# Altium PCB SL-DPT100.PcbDoc (part 3 of 3)
Units mm, origin at the board's own origin, x right, y up, seen from the top; angles counter-clockwise.
Board outline 82 x 97 mm, 4 copper layers (Top Layer, VCC, GND, Bottom Layer); 177 components, 169 nets, 599 pads, 430 vias.
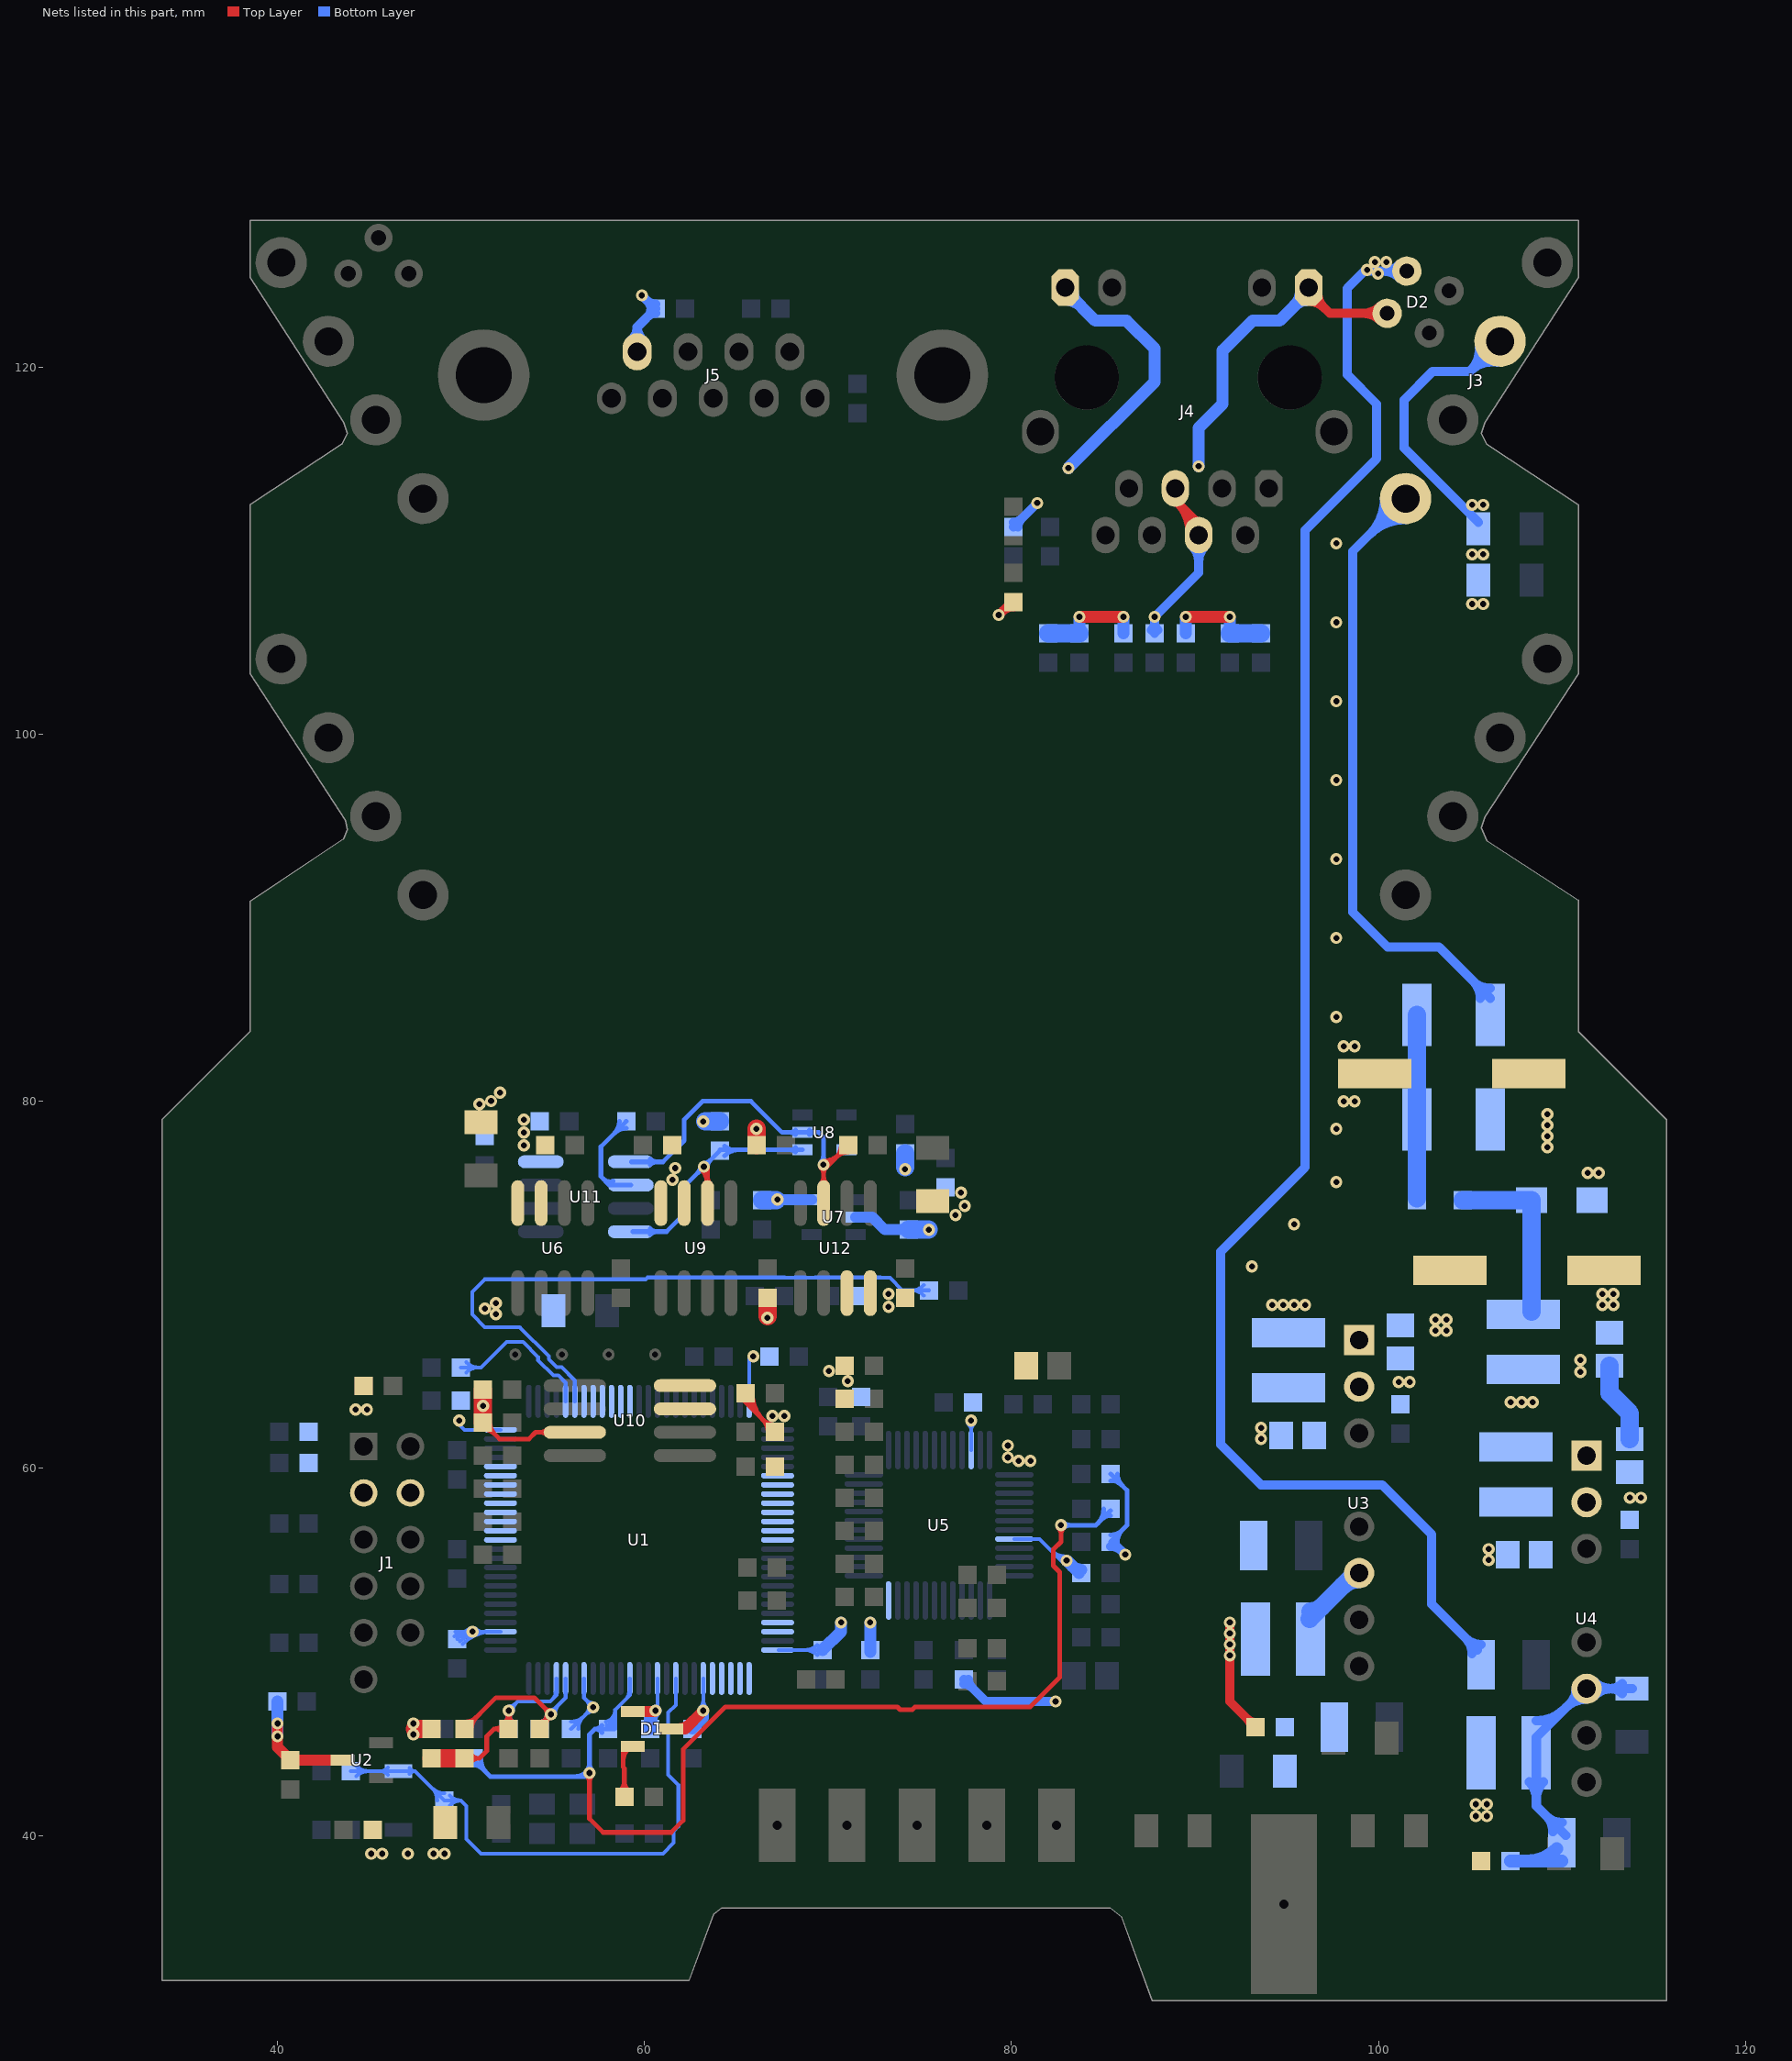
[diagram p5: the nets of this part, all layers, seen from the top]

## Via types
v1: diameter 0.66, hole 0.33, Top Layer to Bottom Layer, tented both sides, 430 vias

## Nets (pads, with @x,y where several pads share a name; then routed paths per layer and width w, separated by ;. In a path a pad name is that pad's centre, name@x,y a point inside that pad or via, vN(x,y) a via of type N, cw(c..) or ccw(c..) an arc to the next point about the centre after c; other vN are vias at no path point) (continued)
PC15: C52.2 R45.1 U1.9 X1.1 | length 36.4
  Bottom Layer w0.203: C52.2@44,43.5 47.5,43.5 ; C52.2@44.282,43.218 cw(c44.962,42.538) 44.962,43.5 cw(c44.962,44.462) C52.2@44.282,43.782 ; X1.1@46.021,43.307 ccw(c45.554,42.84) 45.554,43.5 ccw(c45.554,44.16) X1.1@46.021,43.693 ; X1.1@47.186,43.34 cw(c47.5,43.112) 47.5,43.5 ; X1.1@47.186,43.66 ccw(c47.5,43.888) 47.5,43.5 ; R45.1@48.702,41.9 ccw(c47.74,41.9) 48.42,42.58 ccw(c49.1,43.26) R45.1@49.1,42.298 ; R45.1@49.395,41.632 cw(c50,41.083) 50,41.9 ; R45.1@49.395,42.168 ccw(c50,42.717) 50,41.9 ; U1.9@61.7,48.55 61.7,47.1 61.295,46.695 61.295,43.3 61.847,42.748 61.847,40.489 61.591,40.233 61.591,39.591 61.005,39.005 51.095,39.005 50.3,39.8 50.3,41.6 50,41.9 ; 47.5,43.5 R45.1@49.1,41.9 50,41.9
PD0: U1.81
PD1: U1.82
PD2: U1.83
PD3: U1.84
PD4: U1.85
PD5: U1.86
PD6: U1.87
PD7: U1.88
PD8: R50.1 U1.55 | length 9.8
  Bottom Layer w0.203: R50.1@50,65.5 51.1,65.5 52.482,66.882 53.377,66.882 54.2,66.059 54.2,65.895 55.03,65.065 55.035,65.065 55.044,65.056 55.302,65.056 55.7,64.658 U1.55@55.7,63.65 ; R50.1@50.282,65.218 cw(c50.962,64.538) 50.962,65.5 cw(c50.962,66.462) R50.1@50.282,65.782
PD9: R51.1 U1.56 | length 36.6
  Bottom Layer w0.203: U1.56@56.2,63.65 56.2,64.799 55.49,65.509 55.232,65.509 55.223,65.518 55.218,65.518 54.818,65.918 54.818,65.923 54.779,65.962 54.779,66.121 53.2,67.7 51.3,67.7 50.618,68.382 50.618,69.618 51.3,70.3 60.064,70.3 60.164,70.4 67.636,70.4 67.643,70.393 68.207,70.393 68.214,70.4 68.736,70.4 68.743,70.393 69.307,70.393 69.314,70.4 72.861,70.4 72.868,70.393 73.371,70.393 74.064,69.7 R51.1@75.5,69.7 ; R51.1@75.218,69.418 ccw(c74.538,68.738) 74.538,69.7 ccw(c74.538,70.662) R51.1@75.218,69.982
PD10: U1.57
PD11: U1.58
PD12: U1.59
PD13: U1.60
PD14: U1.61
PD15: U1.62
PE0: U1.97
PE1: U1.98
PE2: U1.1
PE3: U1.2
PE4: U1.3
PE5: U1.4
PE6: U1.5
PE7: U1.38
PE8: U1.39
PE9: U1.40
PE10: U1.41
PE11: U1.42
PE12: U1.43
PE13: U1.44
PE14: U1.45
PE15: U1.46
RE#: R62.1 U11.2 | length 7.4
  Bottom Layer w0.254: 57.753,75.772 ccw(c58.118,76.137) U11.2@58.28,75.647 ; R62.1@58.627,78.9 cw(c57.727,78.9) 58.363,78.263 cw(c59,77.627) R62.1@59,78.527 ; R62.1@59,78.9 57.623,77.523 57.623,75.902 58.09,75.435 U11.2@59.25,75.435
RST#: C48.1 R36.2 R46.1 R47.2 U1.14 | length 75.7
  Top Layer w0.254: v1@56.856,43.256 cw(c56.509,42.909) 57,42.909 cw(c57.491,42.909) v1@57.144,43.256 ; v1(57,43.4) 57,40.91 57.747,40.163 61.453,40.163 62.1,40.81 62.1,44.69 64.403,46.993 73.782,46.993 73.932,46.843 74.593,46.843 74.743,46.993 81.018,46.993 82.629,48.603 82.629,54.346 82.279,54.696 82.279,55.579 82.7,56 v1@82.7,56.8 ; v1@82.556,56.756 cw(c82.209,56.409) 82.7,56.409 cw(c83.191,56.409) v1@82.844,56.756
  Bottom Layer w0.203: C48.1@57.895,46.184 ccw(c57.714,46.846) 58.4,46.846 ; C48.1@57.949,45.988 ccw(c57.787,46.58) 58.4,46.58 ; C48.1@58.002,45.792 ccw(c57.86,46.314) 58.4,46.314 ; C48.1@58.4,45.8 58.4,46.846 ; 59.009,47.455 ccw(c58.663,47.8) U1.14@59.152,47.8 ; U1.14@59.2,48.55 59.2,47.646 58.4,46.846
  Bottom Layer w0.254: R46.1@49.1,44.2 49.2,44.1 50.7,44.1 51.6,43.2 56.95,43.2 57,43.25 v1(57,43.4) 57,45.5 57.3,45.8 ; R46.1@49.184,44.284 ccw(c49.629,44.729) 49.629,44.1 ; R46.1@49.364,43.936 cw(c49.759,43.541) 49.759,44.1 ; R46.1@49.364,44.464 ccw(c50.242,45.342) R47.2@50.242,44.1 ; R46.1@49.558,44.1 ccw(c49.558,45.342) R47.2@50.436,44.464 ; 50.041,44.1 cw(c50.041,43.541) R47.2@50.436,43.936 ; 50.171,44.1 ccw(c50.171,44.729) R47.2@50.616,44.284 ; R47.2@50.7,43.827 cw(c50.7,43.168) 51.166,43.634 ; R47.2@51.073,44.2 ccw(c52.215,44.2) 51.408,43.392 ; 56.127,43.2 ccw(c56.127,44.373) v1@56.956,43.544 ; 56.64,43.2 ccw(c56.64,43.76) v1@57.036,43.364 ; v1@56.856,43.544 ccw(c56.509,43.891) 57,43.891 ccw(c57.491,43.891) v1@57.144,43.544 ; C48.1@57.69,45.592 ccw(c57.3,45.33) 57.3,45.8 ; C48.1@57.69,46.008 cw(c57.3,46.27) 57.3,45.8 ; C48.1@58.37,45.8 57.3,45.8 ; v1@82.8,56.9 84.6,56.9 R36.2@85.4,57.7 ; v1@82.844,56.756 cw(c83.191,56.409) 83.191,56.9 cw(c83.191,57.391) v1@82.844,57.044 ; 84.693,56.993 ccw(c83.885,57.8) R36.2@85.027,57.8 ; 84.934,57.234 cw(c85.4,56.768) R36.2@85.4,57.427
  other v1: 82.697,56.903
RXD: R66.1 U8.2 U11.1 U12.3 | length 26.1
  Top Layer w0.254: v1@69.606,76.396 cw(c69.223,76.013) 69.765,76.013 ; U12.3@69.607,75.508 ccw(c69.227,75.888) 69.765,75.888 ccw(c70.303,75.888) U12.3@69.923,75.508 ; v1@69.75,76.489 ccw(c69.75,77.067) 70.158,76.658 ; v1@69.75,76.743 ccw(c69.75,77.934) 70.592,77.092 ; U12.3@69.765,74.25 69.765,76.265 R66.1@71.1,77.6 ; 69.765,76.086 cw(c70.204,76.086) v1@69.894,76.396 ; R66.1@70.727,77.6 cw(c69.827,77.6) 70.463,76.963 cw(c71.1,76.326) R66.1@71.1,77.227
  Bottom Layer w0.254: U11.1@59.3,76.7 61,76.7 62.157,77.857 62.157,78.997 63.16,80 65.8,80 67.5,78.3 69.5,78.3 69.75,78.05 v1@69.75,76.525 ; U11.1@60.308,76.547 cw(c60.676,76.179) 60.676,76.7 ; U11.1@60.308,76.863 ccw(c60.7,77.255) 60.7,76.7 ; U8.2@68.228,78.178 ccw(c67.932,77.882) 67.932,78.3 ccw(c67.932,78.718) U8.2@68.228,78.422 ; U8.2@68.972,78.178 cw(c69.268,77.882) 69.268,78.3 cw(c69.268,78.718) U8.2@68.972,78.422 ; v1@69.606,76.684 ccw(c69.259,77.031) 69.75,77.031 ccw(c70.241,77.031) v1@69.894,76.684
  other v1: 69.75,76.54
TXD: R61.1 U8.1 U9.6 U11.4 | length 20.5
  Top Layer w0.254: v1@63.091,76.291 cw(c62.262,75.462) U9.6@63.435,75.462 ; v1@63.271,76.471 cw(c62.875,76.075) 63.435,76.075 ; U9.6@63.282,75.513 ccw(c62.952,75.865) 63.435,75.865 ccw(c63.918,75.865) U9.6@63.588,75.513 ; U9.6@63.435,74.45 v1@63.435,76.445
  Bottom Layer w0.254: U11.4@59.355,72.9 61.2,72.9 62.227,73.927 62.227,75.427 R61.1@64.1,77.3 ; U11.4@60.308,72.737 cw(c60.7,72.345) 60.7,72.9 ; U11.4@60.308,73.053 ccw(c60.676,73.421) 60.676,72.9 ; v1@63.032,76.435 cw(c62.541,76.435) 62.888,76.088 cw(c63.235,75.741) v1@63.235,76.232 ; v1@63.235,76.638 ccw(c63.235,77.129) 63.582,76.782 ccw(c63.929,76.435) v1@63.438,76.435 ; R61.1@64.1,77.35 U8.1@68.6,77.35 ; R61.1@64.364,77.036 cw(c65.121,76.279) 65.121,77.35 ; R61.1@64.364,77.564 ccw(c64.88,78.08) 64.88,77.35 ; U8.1@68.228,77.228 ccw(c67.932,76.932) 67.932,77.35 ccw(c67.932,77.768) U8.1@68.228,77.472
  other v1: 63.235,76.435
V3.3: C4.1 C8.2 C27.1 C28.1 C29.1 C31.2 C32.2 C33.2 C42.1 C43.1 C44.1 C45.1 C46.1 C47.1 C55.1 C56.1 C57.2 C60.1 C64.1 C71.1 C72.1 C73.2 C74.2 C75.2 D1.1 D2.3 J1.3 J1.4 J4.4 J4.5 J4.9 J4.12 L1.2 L4.2 R15.2 R19.1 R20.2 R22.1 R23.2 R24.2 R26.1 R29.1 R31.2 R33.1 R34.2 R38.2 R48.1 R54.1 R56.2 R57.2 R58.2 R59.2 R65.2 U1.11 U1.19 U1.28 U1.50 U1.75 U1.100 U2.3 U5.22 U5.32 U5.48 U10.3 U10.7 U10.8 U12.7 U12.8 | length 160.5
  Top Layer w0.254: R56.2@51.2,62.127 cw(c51.2,61.227) 51.837,61.863 cw(c52.474,62.5) R56.2@51.573,62.5 ; R56.2@51.2,62.5 52.1,61.6 53.7,61.6 54.065,61.965 U10.3@56.2,61.965 ; U10.3@54.692,61.807 ccw(c54.312,61.427) 54.312,61.965 ccw(c54.312,62.503) U10.3@54.692,62.123 ; C60.1@65.2,63.9 R58.2@67.1,62 ; C60.1@65.365,64.1 ccw(c66.246,64.1) 65.623,63.477 ; C60.1@65.619,64.1 ccw(c67.113,64.1) 66.057,63.043 ; C60.1@65.873,64.1 ccw(c67.981,64.1) 66.49,62.61 ; R58.2@66.727,62 ccw(c65.827,62) 66.463,62.637 ccw(c67.1,63.273) R58.2@67.1,62.373
  Top Layer w0.5: v1(79.3,106.5) R26.1@80,107.2 ; v1@79.503,106.703 cw(c80.1,106.105) R26.1@80.1,106.95 ; J4.5@88.93,112.745 J4.4@90.2,111.475 ; J4.5@89.085,112.59 cw(c87.6,111.105) J4.4@89.7,111.105 ; v1(91.9,51.6) 91.9,47.3 C8.2@93.3,45.9 ; C8.2@93.05,45.9 ccw(c92.446,45.9) 92.873,46.327 ccw(c93.3,46.754) C8.2@93.3,46.15 ; J4.9@96.075,124.2 97.34,122.935 D2.3@100.476,122.935 ; J4.9@96.185,123.585 cw(c96.185,122.366) 97.047,123.228 ; J4.9@96.685,124.085 ccw(c97.881,124.085) 97.035,123.24 ; D2.3@100.087,122.546 ccw(c99.148,121.607) 99.148,122.935 ccw(c99.148,124.263) D2.3@100.087,123.324
  Top Layer w0.6: v1(40,46.1) 40,44.8 C55.1@40.7,44.1 U2.3@43.55,44.1 ; D1.1@59.35,46.75 v1@60.55,46.75
  Top Layer w0.66: v1(83.7,106.4) v1(86.1,106.4) ; v1(89.5,106.4) v1(91.9,106.4)
  Top Layer w1: v1@47.5,45.8 L1.2@48.4,45.8 ; R56.2@51.2,62.5 R59.2@51.2,64.3 ; v1@66.7,68.3 R54.1@66.7,69.3
  Bottom Layer w0.203: C46.1@49.651,50.851 cw(c50.251,50.251) C46.1@50.251,51.1 ; C46.1@49.7,51.1 U1.28@52.15,51.1 ; C46.1@49.794,50.708 cw(c50.742,49.76) v1@50.742,51.1 ; v1@49.9,62.4 50.2,62.1 U1.50@52.15,62.1 ; C46.1@49.938,50.564 cw(c51.232,49.27) 51.232,51.1 ; C46.1@50.082,50.42 cw(c51.723,48.779) U1.28@51.723,51.1 ; v1@50.463,50.938 ccw(c50.073,50.548) 50.073,51.1 ccw(c50.073,51.652) v1@50.463,51.262 ; v1@50.787,50.938 cw(c51.177,50.548) 51.177,51.1 cw(c51.177,51.652) v1@50.787,51.262 ; C44.1@56,45.8 57.2,47 56.7,47.5 U1.19@56.7,48.55 ; C44.1@56,46.198 ccw(c56,47.16) 56.68,46.48 ccw(c57.36,45.8) C44.1@56.398,45.8 ; 56.776,46.576 cw(c57.2,46.151) v1@57.2,46.751 ; 56.824,46.624 ccw(c56.468,46.98) v1@56.971,46.98 ; v1@56.991,46.98 ccw(c56.44,46.98) 56.83,47.37 ccw(c57.22,47.76) v1@57.22,47.209 ; v1@60.7,46.8 U1.11@60.7,48.55 ; U1.75@65.7,63.65 v1@65.7,66.1 ; U1.100@67.3,50.1 C45.1@69.8,50.1 ; C45.1@69.418,49.818 ccw(c68.738,49.138) 68.738,50.1 ccw(c68.738,51.062) C45.1@69.418,50.382 ; v1@77.638,62.438 cw(c77.248,62.048) 77.8,62.048 cw(c78.352,62.048) v1@77.962,62.438 ; U5.22@77.8,61 v1@77.8,62.59 ; U5.32@80.15,56.15 81.525,56.15 v1@82.875,54.8 ; 82.098,55.577 ccw(c83,56.48) v1@83,55.204 ; 82.445,55.23 ccw(c83,55.786) v1@83,55
  Bottom Layer w0.254: R34.2@85.4,56 86.29,56.89 86.29,58.81 R22.1@85.4,59.7 ; R22.1@85.4,59.327 cw(c85.4,58.426) 86.037,59.063 cw(c86.673,59.7) R22.1@85.773,59.7 ; 86.037,56.637 cw(c85.4,57.273) 85.4,56.373 ccw(c85.4,57.273) 86.037,56.637 ; 86.037,56.637 ccw(c86.674,56) 85.773,56 cw(c86.674,56) 86.037,56.637
  Bottom Layer w0.5: R19.1@80.1,111.3 v1(81.4,112.6) ; R19.1@80.1,111.55 ccw(c80.1,112.154) 80.527,111.727 ccw(c80.954,111.3) R19.1@80.35,111.3 ; R34.2@85.4,55.75 cw(c85.4,54.905) v1@85.997,55.503 ; R34.2@85.6,55.9 v1(86.2,55.3) ; C28.1@87.623,105.677 ccw(c87.196,106.104) 87.8,106.104 ccw(c88.404,106.104) C28.1@87.977,105.677 ; C28.1@87.8,105.5 v1(87.8,106.4) 90.2,108.8 J4.4@90.2,110.855 ; J4.4@89.847,110.251 cw(c88.993,109.398) 90.2,109.398 cw(c91.407,109.398) J4.4@90.554,110.251
  Bottom Layer w0.508: R23.2@77.4,48.254 cw(c77.4,47.66) 77.82,48.08 cw(c78.24,48.5) R23.2@77.646,48.5 ; R23.2@77.4,48.5 78.6,47.3 v1(82.4,47.3)
  Bottom Layer w0.66: v1(40,45.4) R48.1@40,47.3 ; C43.1@60.3,45.8 60.3,46.5 v1(60.6,46.8) ccw(c61.164,46.236) C43.1@60.452,45.876 ; C45.1@69.7,50.1 70.71,51.11 v1(70.71,51.6) ; C33.2@72.3,50 v1(72.3,51.6) ; J4.12@82.92,123.69 cw(c82.92,122.484) 83.773,123.337 ; v1@83.004,54.975 C32.2@83.679,54.3 ; J4.12@83.085,124.025 84.57,122.54 86.26,122.54 87.8,121 87.8,119.2 v1(83.1,114.5) ; C32.2@83.304,54.675 ccw(c83.8,55.171) C32.2@83.8,54.47 ; J4.12@83.34,124.11 ccw(c84.161,124.11) 83.58,123.53 ; R31.2@83.7,105.5 v1(83.7,106.4) ; R24.2@86.1,105.5 v1(86.1,106.4) ; R20.2@89.5,105.5 v1(89.5,106.4) ; v1(90.2,114.6) 90.2,116.7 91.5,118 91.5,120.9 93.14,122.54 94.6,122.54 J4.9@96.285,124.225 ; R15.2@91.9,105.5 v1(91.9,106.4) ; 95.4,123.34 cw(c96.185,122.554) J4.9@96.185,123.665 ; 95.497,123.437 ccw(c94.849,124.085) J4.9@95.765,124.085
  Bottom Layer w1: C29.1@82,105.5 R31.2@83.7,105.5 ; R15.2@91.9,105.5 C27.1@93.6,105.5
  other v1: 45.1,39 45.7,39 47.1,39 48.5,39 49.1,39 47.4,45.5 47.4,46.1 57.2,46.98 91.9,49.8 91.9,50.4 91.9,51 50.625,51.1 83,54.975 80.39,60.41 81.03,60.41 79.8,60.59 79.8,61.24 49.9,62.6 77.8,62.6 66.975,62.85 67.625,62.85 44.25,63.2 44.87,63.2 51.2,63.4 71.075,64.75 70.05,65.3 65.93,66.1 66.7,68.2 51.9,68.4 51.3,68.7 73.3,68.8 51.9,69 73.3,69.5
V3.3_1: C3.1 C6.2 L4.1 R3.1 U3.6 | length 5.2
  Bottom Layer w1: L4.1@96.25,51.8 U3.6@98.74,54.29 ; L4.1@96.3,52.2 ccw(c96.3,53.045) L4.1@96.897,52.447 ; 98.044,53.594 cw(c98.94,52.698) U3.6@98.94,53.965
V5.0: C17.1 C21.2 C58.1 C59.1 C61.2 C62.1 C63.1 C67.1 C68.1 C69.2 C70.2 D2.1 J5.6 L7.2 R53.2 R61.2 R63.2 R64.2 U6.7 U6.8 U7.2 U7.5 U8.5 U9.7 U9.8 U11.8 | length 112.7
  Top Layer w1: R64.2@66.1,77.6 v1(66.1,78.5)
  Bottom Layer w0.5: D2.1@101.16,124.848 ccw(c100.221,123.909) 100.221,125.237 ccw(c100.221,126.565) D2.1@101.16,125.626 ; D2.1@101.549,125.237 99.237,125.237 98.3,124.3 98.3,119.6 99.9,118 99.9,115.011 96,111.111 96,76.4 91.4,71.8 91.4,61.3 93.6,59.1 100.2,59.1 102.9,56.4 102.9,52.6 C17.1@105.4,50.1 ; C17.1@105.1,49.9 ccw(c103.893,49.9) 104.746,50.754 ccw(c105.6,51.607) C17.1@105.6,50.4
  Bottom Layer w0.508: J5.6@59.263,121.471 ccw(c58.675,122.187) 59.602,122.187 ; J5.6@59.602,120.83 59.602,122.187 ; v1(59.855,123.915) R63.2@60.505,123.265 ; J5.6@59.941,121.471 cw(c60.529,122.187) 59.602,122.187 ; R63.2@60.142,123.628 ccw(c60.605,124.09) R63.2@60.605,123.436 ; R63.2@60.203,123.567 cw(c59.825,123.19) 60.359,123.19 cw(c59.765,123.19) 60.185,122.77 cw(c60.605,122.35) R63.2@60.605,122.944 ; R63.2@60.605,123.19 59.602,122.187
  Bottom Layer w0.6: v1@67.278,74.647 U7.5@69.1,74.647 ; U7.2@71.5,73.697 72.403,73.697 73.1,73 R53.2@74.5,73 ; 73.893,73 ccw(c73.893,73.517) R53.2@74.259,73.151
  Bottom Layer w1: v1@63.3,78.9 R61.2@64.1,78.9 ; C62.1@66.4,74.61 v1@67.19,74.61 ; v1@74.2,76.4 C61.2@74.2,77.15 ; R53.2@74.4,73.01 v1@75.49,73.01
  other v1: 105.3,41.05 105.9,41.05 105.3,41.7 105.9,41.7 75.5,73 76.95,73.8 77.45,74.3 67.25,74.65 77.25,75.025 61.52,75.72 74.2,76.3 61.67,76.36 53.43,77.6 53.43,78.3 63.2,78.9 53.43,79 51,79.85 51.64,80.015 52.125,80.475 99.975,125.1 99.375,125.3 99.8,125.725 100.425,125.725
V5.0_1: C16.1 C19.2 L7.1 R5.1 U4.6 | length 28.6
  Bottom Layer w0.508: L7.1@108.214,42.914 cw(c107.282,41.982) 108.6,41.982 cw(c109.918,41.982) L7.1@108.986,42.914 ; L7.1@108.6,46.246 ccw(c108.6,48.409) 110.13,46.88 ; C16.1@109.504,40.2 ccw(c108.307,40.2) 109.153,41.047 ccw(c110,41.893) C16.1@110,40.696 ; 110.195,46.945 cw(c111.34,45.799) U4.6@111.34,47.419 ; C16.1@110.2,40 108.6,41.6 L7.1@108.6,44.5 108.6,45.35 U4.6@111.4,48.15 ; 110.436,47.186 ccw(c109.632,47.99) U4.6@110.769,47.99 ; U4.6@111.3,48 R5.1@113.825,48 ; U4.6@111.744,47.586 cw(c112.743,46.587) 112.743,48 ; U4.6@111.744,48.394 ccw(c112.694,49.344) 112.694,48 ; R5.1@113.295,47.72 ccw(c112.619,47.044) 112.619,48 ccw(c112.619,48.956) R5.1@113.295,48.28
  Bottom Layer w0.7: C19.2@107.2,38.6 C16.1@110,38.6 ; 108.069,38.6 ccw(c108.069,40.931) C16.1@109.717,39.283
V24+: F3.1 J3.4 | length 42.1
  Bottom Layer w0.5: J3.4@100.327,112.842 cw(c97.558,112.842) 99.516,110.884 cw(c101.474,108.926) J3.4@101.474,111.695 ; J3.4@100.827,112.842 cw(c99.265,112.842) 100.37,111.738 cw(c101.474,110.633) J3.4@101.474,112.195 ; J3.4@101.474,112.842 98.6,109.968 98.6,90.3 100.5,88.4 103.3,88.4 F3.1@106.1,85.6 ; F3.1@105.55,85.6 ccw(c104.222,85.6) 105.161,86.539 ccw(c106.1,87.478) F3.1@106.1,86.15
V24+1: D3.1 F3.2 R4.1 | length 10
  Bottom Layer w1: D3.1@102.1,74.7 F3.2@102.1,84.7
V24+2: D3.2 D4.2 L5.2 | length 9.7
  Bottom Layer w1: D3.2@104.6,74.6 D4.2@108.3,74.6 ; L5.2@108.35,68.55 D4.2@108.35,74.6
V24+3: C9.2 C11.1 C22.2 C65.1 C66.2 L3.1 L5.1 L6.1 | length 4.5
  Bottom Layer w1: C66.2@112.6,65.6 112.6,64.1 113.7,63 C22.2@113.7,61.6
  other v1: 107.2,63.6 107.8,63.6 108.4,63.6 111,65.25 111,65.9 103.1,67.5 103.7,67.5 103.1,68.1 103.7,68.1 94.2,68.9 94.8,68.9 95.4,68.9 96,68.9 98.1,80 98.7,80 98.1,83 98.7,83
V24+4: C10.2 L3.2 U3.2
V24+5: C23.2 L6.2 U4.2
V24-: C9.1 C10.1 C11.2 C12.2 C22.1 C23.1 C24.2 C26.1 C65.2 C66.1 D4.1 J3.1 R4.2 R71.1 U3.1 U4.1 | length 18.1
  Bottom Layer w0.5: R71.1@105.45,111.55 101.403,115.597 101.403,118.225 102.953,119.775 104.986,119.775 ; J3.1@105.488,121.261 cw(c103.736,121.025) 104.986,119.775 ; J3.1@106.472,120.277 ccw(c106.236,118.525) 104.986,119.775 ; J3.1@106.625,121.414 104.986,119.775
  other v1: 106,55 106,55.6 113.7,58.4 114.3,58.4 93.6,61.6 93.6,62.2 101.1,64.7 101.7,64.7 112.2,68.9 112.8,68.9 112.2,69.5 112.8,69.5 93.1,71 95.4,73.3 97.7,75.6 111.4,76.1 112,76.1 109.2,77.5 109.2,78.1 97.7,78.5 109.2,78.7 109.2,79.3 97.7,84.6 97.7,88.9 97.7,93.2 97.7,97.5 97.7,101.8 97.7,106.1 105.1,107.1 105.7,107.1 105.1,109.8 105.7,109.8 97.7,110.4 105.1,112.5 105.7,112.5
V_BAT: C1.1 D1.2 | length 5.1
  Top Layer w0.254: C1.1@58.636,42.364 ccw(c58,43) 58.9,43 ccw(c59.801,43.001) C1.1@59.164,42.364 ; 58.827,44.015 cw(c59.835,44.015) D1.2@59.122,44.728 ; D1.2@58.827,45 58.827,43.731 58.9,43.658 C1.1@58.9,42.1
VBAT: C2.1 D1.3 U1.6 | length 7.9
  Top Layer w0.6: D1.3@61.45,45.8 62.21,45.8 v1@63.2,46.79 ; D1.3@61.8,45.8 ccw(c61.8,46.79) 62.5,46.09
  Bottom Layer w0.203: v1@63.038,46.962 ccw(c62.648,47.352) 63.2,47.352 ccw(c63.752,47.352) v1@63.362,46.962 ; v1(63.2,46.8) U1.6@63.2,48.55
  Bottom Layer w0.6: C2.1@62.556,45.995 ccw(c62.375,46.8) v1(63.2,46.8) 63.2,46.4 C2.1@62.6,45.8
VDDA: C40.1 C41.1 L1.1 R1.1 U1.22 | length 19.2
  Top Layer w0.254: R1.1@50.2,44.2 51,44.2 ; R1.1@50.486,43.96 cw(c51,43.529) 51,44.2 ; R1.1@50.486,44.44 ccw(c51,44.871) 51,44.2 ; C41.1@52.314,45.56 ccw(c51.8,45.129) 51.8,45.8 ; C41.1@52.314,46.04 cw(c51.8,46.471) 51.8,45.8 ; C41.1@52.336,46.064 ccw(c51.7,46.7) 52.6,46.7 ccw(c53.5,46.7) C41.1@52.864,46.064 ; v1@52.456,46.656 cw(c52.109,46.309) 52.6,46.309 cw(c53.091,46.309) v1@52.744,46.656 ; v1(52.6,46.8) C41.1@52.6,45.8 51.8,45.8 ; 51,44.2 51.4,44.6 51.4,45.4 51.8,45.8
  Top Layer w1: L1.1@48.4,44.2 R1.1@50.2,44.2
  Bottom Layer w0.203: v1(52.6,46.8) 53.1,47.3 54.859,47.3 55.2,47.641 U1.22@55.2,48.55 ; v1@52.6,47.029 ccw(c52.6,47.58) 52.99,47.19 ccw(c53.38,46.8) v1@52.829,46.8 ; 55.005,47.446 ccw(c54.651,47.8) U1.22@55.152,47.8
  Bottom Layer w0.254: C40.1@52.336,46.064 ccw(c51.7,46.7) 52.6,46.7 ccw(c53.501,46.701) C40.1@52.864,46.064 ; v1@52.456,46.656 cw(c52.109,46.309) 52.6,46.309 cw(c53.091,46.309) v1@52.744,46.656 ; C40.1@52.6,45.8 v1(52.6,46.8)
VREF+: C38.1 C39.1 R1.2 U1.21 | length 17.8
  Top Layer w0.254: R1.2@50.2,45.8 51.907,47.507 53.993,47.507 v1(54.9,46.6) ; R1.2@50.2,46.173 ccw(c50.2,47.073) 50.837,46.437 ccw(c51.473,45.8) R1.2@50.573,45.8 ; C39.1@54.2,45.9 v1(54.9,46.6) ; C39.1@54.3,46.173 ccw(c54.3,46.591) C39.1@54.595,46.295 ; C39.1@54.417,45.82 cw(c54.903,45.905) C39.1@54.554,46.254 ; C39.1@54.667,45.864 cw(c55.492,46.008) v1(54.9,46.6) ; v1@54.9,46.397 ccw(c54.9,45.906) 54.553,46.253 ccw(c54.206,46.6) 54.697,46.6 ccw(c54.206,46.6) 54.553,46.947 ccw(c54.9,47.294) v1@54.9,46.803
  Bottom Layer w0.203: v1@54.85,46.65 55.7,47.5 U1.21@55.7,48.55 ; v1@54.9,46.829 ccw(c54.9,47.139) 55.12,46.92 ; v1@55.129,46.6 cw(c55.922,46.6) 55.361,47.161
  Bottom Layer w0.254: C38.1@54.2,45.9 v1(54.9,46.6) ccw(c55.492,46.008) C38.1@54.667,45.864 ; C38.1@54.3,46.173 ccw(c54.3,46.591) C38.1@54.595,46.295 ; C38.1@54.417,45.82 cw(c54.903,45.905) C38.1@54.554,46.254 ; v1@54.697,46.6 cw(c54.206,46.6) 54.553,46.253 cw(c54.9,45.906) v1@54.9,46.397
pads on no net: J3.2 J4.0 J4.7 Temp1.1 Temp1.2 Temp1.3 Temp1.4 Temp1.5 Temp2.1 Temp2.2 Temp2.3 Temp2.4 Temp3.1 Temp3.2 Temp3.3 Temp3.4 Temp4.1 Temp4.2 Temp4.3 Temp4.4 U3.5 U5.8 U5.9 U5.10 U5.11 U5.12 U6.1 U6.4 U9.1 U9.4

## Polygon pours and split planes (outlines as drawn)
GND on Bottom Layer "GND" (solid, remove dead copper, pour order 1001): 33.7,32.1 33.7,78.985 38.5,83.773 38.498,90.897 43.475,94.15 43.75,94.575 43.75,95.125 38.5,103.275 38.5,109.85 53.8,109.85 53.8,85.925 48.7,80.825 48.7,73.975 51.25,71.425 76.525,71.425 78.9,73.8 78.9,113.1 79.9,114.1 82,114.1 82.9,115 94.9,115 95.4,114.5 95.4,112.45 94.7,111.75 94.7,76.875 90.101,72.276 90.1,60.75 93.05,57.8 99.65,57.8 101.6,55.85 101.6,44.7 100.8,43.9 98.8,43.9 97.4,42.5 90.4,42.5 89.2,41.3 89.2,39.8 88.5,39.1 86.4,39.1 85.7,39.8 85.7,41.7 83.9,43.5 65.9,43.5 64,41.6 64,36.175 62.472,32.1
GNDD on Bottom Layer "GNDD" (solid, remove dead copper, pour order 1004): 76.125,72.425 51.675,72.425 49.7,74.4 49.7,80.375 54.8,85.5 54.8,110.6 60.15,115.95 60.15,119.15 57.15,122.15 57.15,124.25 59.15,126.25 72.275,126.25 72.7,125.825 72.7,115.2 77.9,110 77.9,74.2
V24- on Bottom Layer "V24" (solid, remove dead copper, pour order 1003): 115.7,53.3 105.525,53.3 104.2,54.625 104.2,56.95 100.75,60.4 94.15,60.4 92.7,61.85 92.7,71.225 97.3,75.825 97.3,110.575 101.025,114.3 104.65,114.3 106.5,112.45 106.5,107.7 107.45,106.75 110.9,106.749 110.9,103.325 105.825,95.5 105.65,94.775 105.925,94.125 110.875,90.904 110.875,83.825 115.7,78.986
GNDD on Bottom Layer "GNDD" (solid, remove dead copper, pour order 1006): 115.65,31.025 115.65,52.3 105.1,52.3 103.7,53.7 102.6,53.7 102.6,46.5 104.3,44.8 104.3,43.7 101.85,41.25 101.45,41.25 101,40.8 101,31.025
GNDD on Top Layer "GNDD" (solid, remove dead copper, pour order 1006): 115.65,31.025 115.65,52.3 104.2,52.3 104.2,43.6 101.85,41.25 101.45,41.25 101,40.8 101,31.025
GND on Top Layer "GND" (solid, remove dead copper, pour order 1001): 33.7,32.1 33.7,78.985 38.5,83.773 38.498,90.897 43.475,94.15 43.75,94.575 43.75,95.125 38.5,103.275 38.5,109.85 53.8,109.85 53.8,85.925 48.7,80.825 48.7,73.975 51.25,71.425 76.525,71.425 78.9,73.8 78.9,113.1 79.9,114.1 82,114.1 82.9,115 94.9,115 95.4,114.5 95.4,112.45 94.7,111.75 94.7,76.875 90.101,72.276 90.1,60.75 93.05,57.8 99.65,57.8 101.6,55.85 101.6,44.7 100.8,43.9 98.8,43.9 97.4,42.5 90.4,42.5 89.2,41.3 89.2,39.8 88.5,39.1 86.4,39.1 85.7,39.8 85.7,41.7 83.9,43.5 65.9,43.5 64,41.6 64,36.175 62.472,32.1
GNDD on Top Layer "GNDD" (solid, remove dead copper, pour order 1004): 76.125,72.425 51.675,72.425 49.7,74.4 49.7,80.375 54.8,85.5 54.8,110.6 60.15,115.95 60.15,119.15 57.15,122.15 57.15,124.25 59.15,126.25 72.275,126.25 72.7,125.825 72.7,115.2 77.9,110 77.9,74.2
V24- on Top Layer "V24" (solid, remove dead copper, pour order 1003): 115.7,53.3 105.525,53.3 104.2,54.625 104.2,56.95 100.75,60.4 94.15,60.4 92.7,61.85 92.7,71.225 97.3,75.825 97.3,110.575 101.025,114.3 104.65,114.3 106.5,112.45 106.5,107.7 107.45,106.75 110.9,106.749 110.9,103.325 105.825,95.5 105.65,94.775 105.925,94.125 110.875,90.904 110.875,83.825 115.7,78.986
V3.3 on VCC (split plane): 163 vertices, not listed, extent 34.718,33.118 101.598,115
V5.0 on VCC (split plane): 104.9,126 104.9,123.7 104.3,123.1 103.3,123.1 102.2,124.2 98.8,124.2 97.9,125.1 96.625,126.375 76.175,126.375 72.7,122.9 72.7,115.2 77.898,110.002 77.898,74.208 76.117,72.427 51.683,72.427 49.702,74.408 49.702,80.392 54.655,85.345 54.718,85.421 54.764,85.508 54.793,85.602 54.802,85.7 54.802,110.602 60.15,115.95 60.15,119.15 57.15,122.15 57.15,124.25 59.882,126.982 103.918,126.982
V24+3 on VCC (split plane): 106.5,112.45 106.5,107.7 107.45,106.75 109.882,106.75 109.882,103.603 104.948,96.057 104.916,96.001 104.884,95.945 104.883,95.943 104.882,95.941 104.858,95.882 104.834,95.822 104.634,95.222 104.625,95.186 104.613,95.152 104.608,95.122 104.6,95.093 104.596,95.057 104.589,95.021 104.587,94.991 104.584,94.961 104.584,94.924 104.582,94.888 104.584,94.858 104.584,94.828 104.589,94.791 104.592,94.755 104.598,94.726 104.602,94.696 104.612,94.66 104.62,94.625 104.63,94.596 104.638,94.567 104.652,94.534 104.664,94.499 104.964,93.799 104.98,93.769 104.993,93.737 105.01,93.709 105.025,93.68 105.044,93.652 105.061,93.623 105.081,93.597 105.1,93.57 105.123,93.545 105.144,93.518 105.167,93.496 105.189,93.471 105.215,93.449 105.239,93.425 105.265,93.406 105.29,93.385 105.319,93.366 105.346,93.346 109.882,90.403 109.882,83.8 109.891,83.667 109.917,83.536 109.959,83.41 110.018,83.291 110.092,83.18 110.18,83.08 114.682,78.578 114.682,53.302 105.508,53.302 104.2,54.611 104.2,56.364 104.202,56.4 104.194,56.546 104.169,56.69 104.129,56.83 104.073,56.965 104.002,57.093 103.918,57.212 103.821,57.321 101.121,60.021 101.012,60.118 100.893,60.202 100.765,60.273 100.63,60.329 100.49,60.369 100.346,60.394 100.2,60.402 94.139,60.402 92.702,61.839 92.702,71.236 96.921,75.454 97.018,75.563 97.102,75.682 97.173,75.81 97.229,75.945 97.269,76.085 97.294,76.229 97.302,76.375 97.302,110.602 101,114.3 104.65,114.3
V5.0 on VCC (split plane): 104.945,52.445 105.021,52.382 105.108,52.336 105.202,52.307 105.3,52.298 114.682,52.298 114.682,32.018 101.002,32.018 101.002,40.802 101.4,41.2 101.8,41.2 104.3,43.7 104.3,44.8 102.602,46.498 102.602,53.7 103.689,53.7
GND on GND (split plane): 156 vertices, not listed, extent 34.718,33.118 101.598,115
GNDD on GND (split plane): 104.9,126 104.9,123.7 104.3,123.1 103.3,123.1 102.2,124.2 99.6,124.2 98.6,123.2 98.6,120 100.2,118.4 100.2,114.911 96.445,111.155 96.382,111.079 96.336,110.992 96.307,110.898 96.298,110.8 96.298,76.258 91.845,71.805 91.782,71.729 91.736,71.642 91.707,71.548 91.698,71.45 91.698,61.6 91.707,61.502 91.736,61.408 91.782,61.321 91.845,61.245 93.545,59.545 93.621,59.482 93.708,59.436 93.802,59.407 93.9,59.398 100.292,59.398 103.198,56.492 103.198,54.4 103.207,54.302 103.236,54.208 103.282,54.121 103.345,54.045 104.945,52.445 105.021,52.382 105.108,52.336 105.202,52.307 105.3,52.298 114.682,52.298 114.682,32.018 101.002,32.018 101.002,40.802 101.4,41.2 101.8,41.2 104.3,43.7 104.3,44.8 102.602,46.498 102.602,56.1 102.593,56.198 102.564,56.292 102.518,56.379 102.455,56.455 100.255,58.655 100.179,58.718 100.092,58.764 99.998,58.793 99.9,58.802 93.508,58.802 91.102,61.208 91.102,71.892 95.555,76.345 95.618,76.421 95.664,76.508 95.693,76.602 95.702,76.7 95.702,111.302 99.6,115.2 99.6,117.625 98,119.225 98,125 96.625,126.375 76.175,126.375 72.7,122.9 72.7,115.2 77.898,110.002 77.898,74.208 76.117,72.427 51.683,72.427 49.702,74.408 49.702,80.392 54.655,85.345 54.718,85.421 54.764,85.508 54.793,85.602 54.802,85.7 54.802,110.602 60.15,115.95 60.15,119.15 57.15,122.15 57.15,124.25 59.882,126.982 103.918,126.982
V24- on GND (split plane): 106.5,112.45 106.5,107.7 107.45,106.75 109.882,106.75 109.882,103.603 104.948,96.057 104.916,96.001 104.884,95.945 104.883,95.943 104.882,95.941 104.858,95.882 104.834,95.822 104.634,95.222 104.625,95.186 104.613,95.152 104.608,95.122 104.6,95.093 104.596,95.057 104.589,95.021 104.587,94.991 104.584,94.961 104.584,94.924 104.582,94.888 104.584,94.858 104.584,94.828 104.589,94.791 104.592,94.755 104.598,94.726 104.602,94.696 104.612,94.66 104.62,94.625 104.63,94.596 104.638,94.567 104.652,94.534 104.664,94.499 104.964,93.799 104.98,93.769 104.993,93.737 105.01,93.709 105.025,93.68 105.044,93.652 105.061,93.623 105.081,93.597 105.1,93.57 105.123,93.545 105.144,93.518 105.167,93.496 105.189,93.471 105.215,93.449 105.239,93.425 105.265,93.406 105.29,93.385 105.319,93.366 105.346,93.346 109.882,90.403 109.882,83.8 109.891,83.667 109.917,83.536 109.959,83.41 110.018,83.291 110.092,83.18 110.18,83.08 114.682,78.578 114.682,53.302 105.508,53.302 104.202,54.608 104.202,56.7 104.193,56.798 104.164,56.892 104.118,56.979 104.055,57.055 100.855,60.255 100.779,60.318 100.692,60.364 100.598,60.393 100.5,60.402 94.108,60.402 92.702,61.808 92.702,71.242 97.155,75.695 97.218,75.771 97.264,75.858 97.293,75.952 97.302,76.05 97.302,110.592 101.011,114.3 104.65,114.3

## Keep-outs
Keep-Out Layer:
  lines w0.2: 43.25,94.034 ccw(c42.75,94.9) 43.616,95.4 ; 43.25,115.609 ccw(c42.75,116.475) 43.616,116.975 ; 43.254,94.028 38.5,90.945 38.5,83.8 33.7,79 33.7,51.094 33.7,32.1 62.431,32.1 ; 43.254,115.603 38.5,112.52 38.5,103.308 43.626,95.407 ; 43.626,116.982 38.5,124.883 38.5,128 110.9,128 110.9,124.883 105.774,116.982 ; 87.681,31 115.7,31 115.7,79 110.9,83.8 110.9,90.945 106.146,94.028 ; 105.774,95.407 110.9,103.308 110.9,112.52 106.146,115.603 ; 105.784,95.4 ccw(c106.65,94.9) 106.15,94.034 ; 105.784,116.975 ccw(c106.65,116.475) 106.15,115.609

## Other copper
Top Layer:
  region net V24+3: 97.8,79.9 98,79.7 98.8,79.7 100.1,81 100.1,82 98.8,83.3 98,83.3 97.8,83.1
  region net V24+3: 101.9,71.6 105.9,71.6 105.9,70 104.05,68.15 104.05,67.35 103.85,67.15 102.95,67.15 102.75,67.35 102.75,69.15 101.9,70
  region net V5.0: 105.1,38.1 106.1,38.1 106.1,40.75 106.25,40.9 106.25,41.85 106.05,42.05 105.15,42.05 104.95,41.85 104.95,40.9 105.1,40.75
  region net GNDE: 51.4,126.2 51.1,126.2 50,127.3 50,127.7 52.5,127.7 52.5,127.3
  region net GNDE: 89.6,41.15 89.6,39.35 91.55,39.35 93.6,37.3 96.1,37.3 98.15,39.35 99.8,39.35 99.8,41.15
  region net V3.3: 80.15,65.625 81.45,65.625 81.45,63.65 81.65,63.45 81.65,60.57 81.16,60.08 79.86,60.08 79.475,60.465 79.475,61.35 80.15,62.025
  region net V3.3: 45.2,64.5 45.2,63.2 44.01,63.2 44.01,63.42 44.2,63.61 44.2,64.5
  region net V3.3: 44.7,40.8 47.7,40.8 48.5,41.6 49.8,41.6 49.8,39.8 49.42,39.42 49.42,38.98 49.11,38.67 45.1,38.67 44.77,39 44.77,39.73 44.7,39.8
  region net V3.3: 71.4,63.8 71.4,66.1 70.4,66.1 69.8,65.5 69.8,65.1 70.4,64.5 70.4,63.8
  region net V3.3: 71,70.8 72.45,70.8 73.45,69.8 74.2,69.8 74.2,69.24 73.51,68.55 73.38,68.55 73.3,68.47 72.62,68.47 72.45,68.3 71,68.3
  region net V3.3: 66.6,60.1 66.6,62.6 65.21,63.99 65.63,63.99 66.44,63.18 67.64,63.18 67.85,62.97 67.85,62.61 67.6,62.36 67.6,60.1
  region net V5.0: 75.425,75.2 77.4,75.2 77.575,75.025 77.575,74.625 77.7,74.5 77.7,74.1 77.2,73.6 76.725,73.6 76.425,73.9 75.425,73.9
  region net V5.0: 52,78.725 52,79.925 52.3,80.225 52.3,80.725 51.925,80.725 51.375,80.175 51.05,80.175 50.95,80.075 50.775,80.075 50.2,79.5 50.2,78.725
  region net PB3: 65.475,61.5 65.14,61.5 64.925,61.285 64.425,61.285 64.095,61.615 63.547,61.615 63.547,61.95 64.05,61.95 65.475,61.95
  region net V3.3: 60.5,64.51 60.5,63.235 60.71,63.025 63.825,63.025 64.4,63.6 65.5,63.6 66,63.1 66,64.6 63.95,64.6 63.8,64.75 60.74,64.75
  region net PB8: 64.99,52.18 65.1,52.29 65.1,52.52 66.04,52.52 66.04,52.3 65.44,51.7
  region net PA4: 52.47,65.2 53.13,65.2 53.13,64.97 53.3,64.8 53.3,64.78 52.3,64.78 52.3,64.8 52.47,64.97
  region net NetR46_2: 45.98,45.8 45.32,45.8 45.32,45.67 45,45.35 45,45.33 46.3,45.33 46.3,45.35 45.98,45.67
  region net V5.0: 55.1,78.9 54.6,79.4 53.3,79.4 52.744,78.844 52.745,73.405 52.95,73.2 54.51,73.2 54.715,73.405 54.715,76.715 55.1,77.1
  region net V5.0: 62.308,73.2 62.515,73.406 62.515,75.495 62,76.01 62,78.1 61,78.1 61,75.951 60.544,75.495 60.544,73.405 60.748,73.2
  pour cut-out: 49.7,46.55 48.9,46.55 48.9,44.7 49.7,44.7
  pour cut-out: 53.8,46.55 53.1,46.55 53.1,44.7 53.8,44.7
Bottom Layer:
  rectangle net NetR39_1: 80.635,55 81.249,55.213
  rectangle net PB13: 54.14,62.67 54.35,63
  region net V5.0: 101.55,126.025 99.675,126.025 98.7,125.05 98.7,124.775 101.55,124.775
  region net V24+4: 95.85,61.05 95.85,63.2 95.05,64 95.05,65.2 99,65.2 99,63.65 98.25,63.65 97.15,62.55 97.15,61.05
  region net V24+3: 100.45,68.45 100.45,67.15 103.75,67.15 105.9,65 105.9,62.4 105.5,62 105.5,60.4 109.5,60.4 109.5,64.2 110.25,64.95 112,64.95 112,66.25 111.85,66.25 111.8,66.2 106.1,66.2 103.85,68.45
  region net V24+3: 93.1,66.6 97.1,66.6 97.1,68.2 96.1,69.2 94.1,69.2 93.1,68.2
  region net V24-: 106.1,107.05 106.05,107 105.8,106.75 104.95,106.75 104.8,106.9 104.8,112.45 104.4,112.85 105.8,112.85 106.1,112.55
  region net V3.3: 93.95,57.15 92.45,57.15 92.45,52.65 91.55,51.75 91.55,49.65 92.5,48.7 94.1,48.7 94.1,52.7 93.95,52.85
  region net V3.3_1: 97.1,52.7 95.5,52.7 95.5,47.5 94.4,46.4 94.4,44.55 94.25,44.4 94.25,42.6 95.55,42.6 95.55,44.1 96,44.55 98.35,44.55 98.35,47.25 97.1,48.5
  region net V5.0: 106.35,50.65 104.85,50.65 104.85,46.55 104.8,46.5 104.8,41.05 105.15,40.7 106.05,40.7 106.4,41.05 106.4,46.5 106.35,46.55
  region net GNDE: 99.8,41.15 89.6,41.15 89.6,39.35 91.55,39.35 93.6,37.3 96.1,37.3 98.15,39.35 99.8,39.35
  region net NetR6_1: 70.95,54.15 72.45,54.15 72.45,54.1 71.65,53.3 71.5,53.3 71.5,53.5 70.95,54.05
  region net V3.3: 55,69.5 54.4,69.5 54.23,69.33 51.76,69.33 51.46,69.03 51.3,69.03 51.3,68.37 51.47,68.37 51.77,68.07 54.03,68.07 54.4,67.7 55,67.7
  region net V3.3: 42.2,62 42.2,60.2 42.992,59.408 47.2,59.408 47.2,57.912 43.088,57.912 41.2,59.8 41.2,62
  region net V3.3: 77.4,63.6 77.4,63.1 77.48,63.02 77.48,62.6 78.12,62.6 78.12,62.82 78.4,63.1 78.4,63.6
  region net V3.3: 72.3,63.9 72.3,64.4 71.89,64.4 70.67,65.62 70.05,65.62 70.05,64.98 70.38,64.98 71.46,63.9
  region net V3.3: 71.7,69.9 71.7,68.9 72.74,68.9 73.12,68.52 73.3,68.7 73.3,69.83 72.57,69.83 72.5,69.9
  region net V3.3: 66.8,66.6 65.8,66.6 65.6,66.4 65.6,64.9 66.3,65.6 66.8,65.6
  region net V3.3: 49.5,63.8 49.5,62.53 50.03,62 51,62 50.5,62.5 50.5,63.8
  pour cut-out: 71.8,78.85 71.8,77.6 67.4,77.6 67.4,78.85
  pour cut-out: 68.3,74.3 68.3,73.1 69.5,73.1 69.5,74.3
  pour cut-out: 66.305,123.94 66.905,123.94 66.905,122.44 66.305,122.44
  region net V5.0: 76.25,75.8 76.925,75.8 77.525,75.2 77.575,75.075 77.575,74.625 77.65,74.55 77.65,74.05 77.125,73.525 76.875,73.525 76.625,73.775 76.625,74.525 76.25,74.9
  region net V5.0: 71,77.65 74.7,77.65 74.7,76.65 73.7,76.65 73.3,77.05 71,77.05
  region net V5.0: 50.8,78.15 50.8,79.95 51.025,80.175 51.375,80.175 51.925,80.725 52.3,80.725 52.3,80.225 51.8,79.725 51.8,78.15
  region net V24+5: 111.34,57.325 110.126,57.326 109.498,56.698 109.5,55.3 108.2,55.3 108.2,56.7 107.3,57.6 107.3,58.975 111.34,58.975
  region net V3.3: 73.304,53.035 73.152,53.035 73.152,52.908 72.009,51.765 72.1,51.4 72.542,51.384 72.923,51.765 73.279,51.765
  region net PA3: 51.765,49.301 52.426,49.301 52.426,49.581 52.857,50.013 52.857,50.114 51.333,50.114 51.333,50.013 51.765,49.581
  region net PA2: 53.696,49.378 53.696,48.235 53.569,48.235 53.34,48.463 53.01,48.463 53.01,49.124 53.34,49.124 53.594,49.378
  region net V5.0: 54.8,79.4 54.8,77.55 55.5,76.85 55.5,76.6 53.11,76.6 53.1,76.61 53.1,79.14 53.36,79.4
  region net NetR40_1: 79.35,59.8 81.3,59.8 81.3,59.6 79.35,59.6
  region net OSC_OUT: 58.2,42.7 58.3,42.7 58.5,42.5 58.9,42.5 58.9,43.4
  region net NetC34_2: 79.7,63.1 79.156,63.1 79.7,63.644
  region net V3.3: 49.8,51.2 50.85,51.2 50.85,50.875 50.275,50.3 49.8,50.3
VCC (plane layer: these items are gaps in the copper):
  circle w1.3: c88.93,113.395 r0.6
  circle w1.3: c90.2,110.855 r0.6
  circle w0.7: c86.1,106.4 r0.3
  circle w0.7: c89.5,106.4 r0.3
  rectangle: 101.7,53.7 104.2,56.4
  region: 99.6,117.625 99.6,115.5 95.4,111.3 95.4,114.5 94.9,115 82.9,115 82,114.1 79.9,114.1 78.8,113 78.8,110 77.9,110 72.7,115.2 72.7,122.9 76.175,126.375 96.625,126.375 98,125 98,119.225
  region: 60.15,119.15 60.15,115.95 54.05,109.85 41.65,109.85 38.65,106.85 38.65,112.35 43.95,115.85 43.95,116.75 38.75,124.75 38.75,127.75 60.65,127.75 57.15,124.25 57.15,122.15
  region: 94.7,110.4 97.1,110.4 101,114.3 104.65,114.3 106.5,112.45 106.5,107.7 107.45,106.75 110.9,106.75 110.9,112.55 105.6,115.896 105.6,117.842 110.5,124.996 110.5,127.496 104.9,127.496 103.401,127.499 104.9,126 104.9,123.7 104.3,123.1 103.3,123.1 102.2,124.2 98.8,124.2 97.9,125.1 97.9,119.2 99.4,117.7 99.4,116.45 94.7,111.75
  region: 65.9,43.5 64,41.6 64,37.3 63,36.3 63,36.2 85.9,36.2 87.716,31.1 101,31.1 101,40.8 101.4,41.2 101.8,41.2 104.3,43.7 104.3,44.8 102.5,46.6 101.7,46.6 101.7,44.8 100.8,43.9 98.8,43.9 97.4,42.5 90.4,42.5 89.2,41.3 89.2,39.8 88.5,39.1 86.4,39.1 85.7,39.8 85.7,41.7 83.9,43.5
  lines w1: 54.3,127.6 54.3,85.7 49.2,80.6 49.2,74.2 51.475,71.925 76.325,71.925 78.4,74 78.4,119.5 ; 100.5,31.4 100.5,41.1 102.1,42.7 102.1,56.1 ; 103.7,54.4 105.3,52.8 115.3,52.8
  lines w2.6: 102.9,56.4 100.2,59.1 93.6,59.1 91.4,61.3 91.4,71.775 96,76.375 96,111.2 100.5,115.7 105.7,115.7
GND (plane layer: these items are gaps in the copper):
  region: 99.6,117.625 99.6,115.2 95.4,111 95.4,114.5 94.9,115 82.9,115 82,114.1 79.9,114.1 78.8,113 78.8,110 77.9,110 72.7,115.2 72.7,122.9 76.175,126.375 96.625,126.375 98,125 98,119.225
  region: 60.15,119.15 60.15,115.95 54.05,109.85 41.65,109.85 38.65,106.85 38.65,112.35 43.95,115.85 43.95,116.75 38.75,124.75 38.75,127.75 60.65,127.75 57.15,124.25 57.15,122.15
  region: 100.2,114.3 104.65,114.3 106.5,112.45 106.5,107.7 107.45,106.75 110.9,106.75 110.9,112.55 105.6,115.896 105.6,117.842 110.5,124.996 110.5,127.496 104.9,127.496 103.401,127.499 104.9,126 104.9,123.7 104.3,123.1 103.3,123.1 102.2,124.2 99.6,124.2 98.6,123.2 98.6,120 100.2,118.4
  region: 65.9,43.5 64,41.6 64,37.3 63,36.3 63,36.2 85.9,36.2 87.716,31.1 101,31.1 101,40.8 101.4,41.2 101.8,41.2 104.3,43.7 104.3,44.8 102.5,46.6 101.7,46.6 101.7,44.8 100.8,43.9 98.8,43.9 97.4,42.5 90.4,42.5 89.2,41.3 89.2,39.8 88.5,39.1 86.4,39.1 85.7,39.8 85.7,41.7 83.9,43.5
  lines w1: 54.3,127.6 54.3,85.7 49.2,80.6 49.2,74.2 51.475,71.925 76.325,71.925 78.4,74 78.4,119.5 ; 98.95,115.3 95.2,111.55 95.2,76.7 90.6,72.1 90.6,61 93.3,58.3 99.9,58.3 102.1,56.1 102.1,42.7 100.5,41.1 100.5,31.4 ; 100.7,114.7 96.8,110.8 96.8,76.05 92.2,71.45 92.2,61.6 93.9,59.9 100.5,59.9 103.7,56.7 103.7,54.4 105.3,52.8 115.3,52.8

## Silkscreen, mask and mechanical layers (free items; w line width, h text height)
Top Overlay:
  lines w0.2: 37,129.1 116.3,129.1 ; 37.3,130 116.3,130
  text "SL-DPT100 V1.1.0" at 57.4,82.2 h1.02
  text "I" at 52.2,65.8 h0.71
  text "T" at 54.6,65.8 h0.71
  text "R" at 57,65.8 h0.71
  text "E" at 59.6,65.8 h0.71
Bottom Overlay:
  text "I" at 53.7,65.8 h0.71
  text "T" at 55.1,65.8 h0.71
  text "R" at 57.5,65.8 h0.71
  text "E" at 60,65.8 h0.71
Mechanical 15:
  lines w0.1: 43.25,94.034 ccw(c42.75,94.9) 43.616,95.4 ; 43.25,115.609 ccw(c42.75,116.475) 43.616,116.975 ; 43.254,94.028 38.5,90.945 38.5,83.8 33.7,79 33.7,51.094 33.7,32.1 62.431,32.1 ; 43.254,115.603 38.5,112.52 38.5,103.308 43.626,95.407 ; 43.626,116.982 38.5,124.883 38.5,128 110.9,128 110.9,124.883 105.774,116.982 ; 62.441,32.12 63.613,35.321 ; 63.616,35.32 cw(c64.72,34.85) 64.72,36.05 84.958,36.05 ; 84.958,36.052 cw(c84.958,34.852) 86.062,35.322 87.66,31 ; 87.681,31 115.7,31 115.7,79 110.9,83.8 110.9,90.945 106.146,94.028 ; 105.774,95.407 110.9,103.308 110.9,112.52 106.146,115.603 ; 105.784,95.4 ccw(c106.65,94.9) 106.15,94.034 ; 105.784,116.975 ccw(c106.65,116.475) 106.15,115.609

## Dimensions
111.5,128 to 116.7,31 on Mechanical 1
37.7,128 to 33,32.1 on Mechanical 1
37.7,128 to 37.7,91.05 on Mechanical 1
37.7,128 to 37.7,103 on Mechanical 1
37.7,128 to 37.6,112.65 on Mechanical 1
37.7,128 to 37.7,124.6 on Mechanical 1
38.7,129 to 110.7,129 on Mechanical 1
33.7,31 to 115.7,30 on Mechanical 1
108.7,129 to 40.7,129 on Mechanical 1
111.7,128 to 112.6,125.7 on Mechanical 1
111.7,128 to 111.7,104.1 on Mechanical 1

## Text inside footprints (layer, text, board x,y; h text height)
D2: Top Overlay "-" at 104.733,125.153 h0.76 r65; Top Overlay "+" at 102.431,126.227 h0.76 r65
J5: Top Overlay "9" at 69.842,120.078 h1.27; Top Overlay "5" at 70.985,117.538 h1.27; Top Overlay "1" at 55.745,117.538 h1.27; Top Overlay "6" at 56.634,120.078 h1.27